# Altium PCB PCB1.PcbDoc
Units mil, origin at the board's own origin, x right, y up, seen from the top; angles counter-clockwise.
Board outline 7940 x 4480 mil, 2 copper layers (Top Layer, Bottom Layer); 28 components, 27 nets, 91 pads, 0 vias.
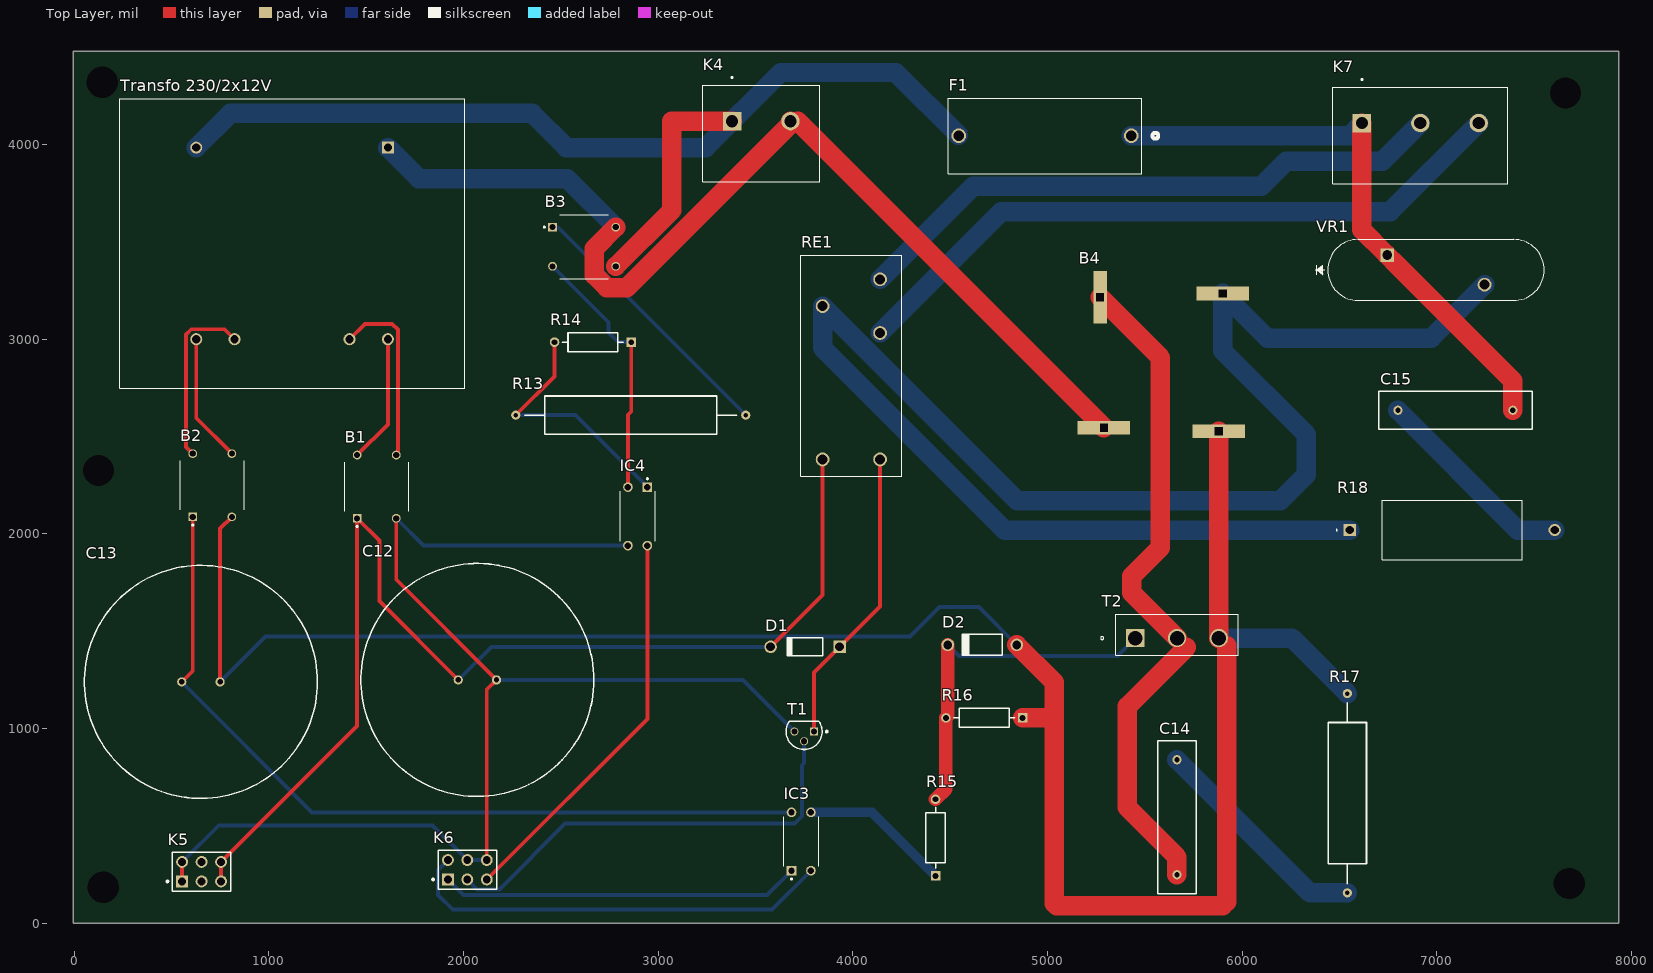
[diagram p0: Top Layer view]
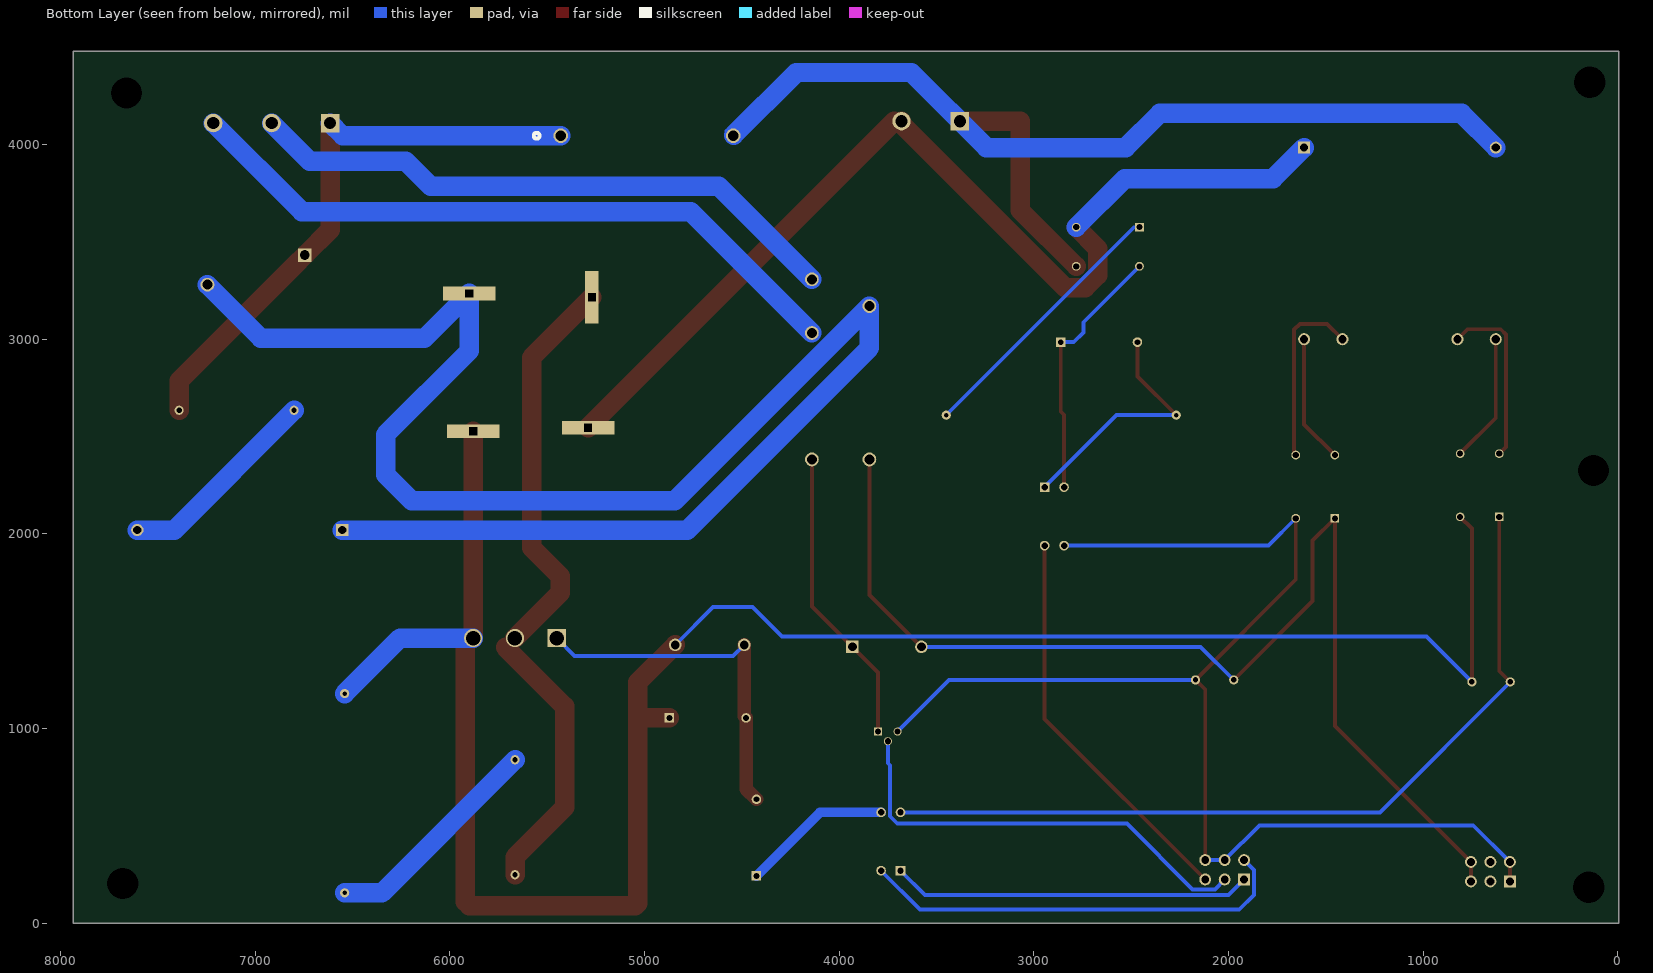
[diagram p1: Bottom Layer view, seen from below]

## Layer stack, top to bottom
Top Solder: solder mask 0.4, Solder Resist, Dk 3.5
Top Layer: signal copper 1.4
Dielectric 1: dielectric 12.6, FR-4, Dk 4.8
Bottom Layer: signal copper 1.4
Bottom Solder: solder mask 0.4, Solder Resist, Dk 3.5

## Board outline
-5,0 7935,0 7935,4480 -5,4480

## Design rules (kind name [scope] priority, off if disabled: settings)
Clearance [All] p1: gap=10 ignorepadtopadclearanceinfootprint=FALSE
Height [All] p1: minheight=0 maxheight=2000 prefheight=500
HoleSize [All] p1: absolutevalues=TRUE maxlimit=300 minlimit=1 maxpercent=80.000 minpercent=20.000
PolygonConnect [All] p1: connectstyle=Relief reliefconductorwidth=10 reliefentries=4 polygonreliefangle="90 Angle" airgapwidth=10
RoutingVias [All] p1: holewidth=28 width=50 viastyle="Through Hole" minholewidth=28 minwidth=50 maxholewidth=28 maxwidth=50
SolderMaskExpansion [All] p1: expansion=4 istentingtop=FALSE
Width [All] p1: maxlimit=100 minlimit=15 preferedwidth=20 minimp=50.000000 maximp=50.000000 favimp=50.000000
28 further rules are at their usual default settings.

## Components (designator, comment, footprint, x,y, rotation, side; value= is the part's Value field where it differs from the comment)
B1 "DB107" DB107 1554.61,2242.6 r90 top
B2 "DB107" DB107 710,2250 r90 top
B3 "DB107" DB107 2620,3475 r0 top
B4 "KBPC3510P" KBPC3510 5585,2881 r0 top
C12 "470µF" Capacitor 1973.15,1250 r0 top
C13 "470µF" Capacitor 553.15,1240 r0 top
C14 "Capacitor 0.22µF 630V" 0.22µF 5665,249.45 r90 top
C15 "0.22µF" 0.22µF 7390.55,2635 r180 top
D1 "1N4007-T" 1N4007-T 3755,1420 r180 top
D2 "1N4742A" 1N4742A 4665,1430 r180 top
F1 "6A" FUSE 5430,4045 r180 top
IC3 "PC817X4J000F" PC817X4J000F 3735,420 r90 top
IC4 "PC817X4J000F" PC817X4J000F 2895,2090 r270 top
K4 "" "2-Polige Connector" 3380,4120 r0 top
K5 "TSW-103-08-L-D" Pin3x2 655,265 r0 top
K6 "TSW-103-08-L-D" Pin3x2 2020,275 r0 top
K7 "3-Polige Connetor" "3-Polige Connector" 6615,4110 r0 top
R13 "47K 3W" "47K 3W" 2268.9,2610 r0 top
R14 "10K 2W" Resistor 2665,2985 r180 top
R15 "1K" Resistor 4425,440 r90 top
R16 "10K" Resistor 4675,1055 r180 top
R17 "2K2 2W" "2K2 2W" 6540,1180 r270 top
R18 "560E 5W" "560Ohm 5W" 6552,2020 r0 top
RE1 "G2R-14 DC12" RELAY_G2R-14_OMR 3845,3343.23 r180 top
T1 "BC547B" Transistor 3750,985 r180 top
T2 "STW26NM60N" TO-247_STM 5450.87,1465 r0 top
"Transfo 230/2x12V" "T1" T1 1611.85,3984.25 r270 top
VR1 "V25S275P" VRES_V25S385P_LTF 6745,3431.57 r0 top

## Footprints (in the part's own frame and the unit in brackets; to place one, negate y for a bottom-side part, rotate by r counter-clockwise, add the part's x,y. Pads: shape width x height; smd on the part's side, far side on the other; paste and mask are expansions set on the pad)
0.22µF [mm]
  round 1.2 hole 0.7: 1(0,0) 2(15,0)
  silkscreen extent -2.5,-2.5 17.5,2.5
1N4007-T [mm] "2-Leads, Axial Lead, Body 4.635x2.36mm, Pin Spacing 9mm"
  rect 1.65x1.65 hole 1.15: 1(-4.5,0)
  round 1.65 hole 1.15: 2(4.5,0)
  silkscreen extent -2.32,-1.18 2.32,1.18, body extent -4.93,-1.18 4.93,1.18, height 2.35
1N4742A [mm] "2-Leads, Axial leaded, Body 2.72x5.2mm, Pin Spacing 9mm"
  round 1.65 hole 1.15: 1(-4.5,0) 2(4.5,0)
  silkscreen extent -2.6,-1.36 2.6,1.36, body extent -4.93,-1.36 4.93,1.36, height 2.71
"2-Polige Connector" [mm]
  rect 2.4x2.4 / inner round 2.4 / far side rect 2.4x2.4 hole 1.6: 1(0,0)
  round 2.4 hole 1.6: 2(7.62,0)
  silkscreen extent -3.81,-7.9 11.43,5.8
"2K2 2W" [mm]
  round 1.2 hole 0.6: 1(0,0) 2(26,0)
  silkscreen extent 1.2,-2.5 24.8,2.5
"3-Polige Connector" [mm]
  rect 2.4x2.4 / inner round 2.4 / far side rect 2.4x2.4 hole 1.6: 1(0,0)
  round 2.4 hole 1.6: 2(7.62,0) 3(15.24,0)
  silkscreen extent -3.81,-7.9 19.05,5.8
"47K 3W" [mm]
  round 1.2 hole 0.6: 1(0,0) 2(30,0)
  silkscreen extent 1.2,-2.5 28.8,2.5
"560Ohm 5W" [mil]
  rect 63x63 / inner round 60 / far side rect 63x63 hole 43 paste-99999 mask+0: 1(0,0)
  round 63 / inner round 60 / far side round 63 hole 43 paste-99999 mask+0: 2(1053,0)
  silkscreen extent -69,-152 886,152, body extent -16,-147 1069,147, height 295
Capacitor [mm]
  round 1.2 hole 0.7: 1(0,0) 2(5,0)
  silkscreen extent -12.7,-15.2 17.7,15.2
DB107 [mm] "DB107"
  rect 1.14x1.14 hole 0.79: 1(-4.125,2.55)
  round 1.14 hole 0.79: 2(-4.125,-2.55) 3(4.125,-2.55) 4(4.125,2.55)
  silkscreen extent -5.29,-4.15 3.18,4.15
FUSE [mil]
  round 75 / inner round 60 / far side round 75 hole 55 paste-99999 mask+0: 1(0,0) 2(885.83,0)
  silkscreen extent -139,-194 940,194
KBPC3510 [mil]
  rect 70x270 hole 40 square mask+6: 1(-315,335)
  rect 270x70 hole 40 square mask+5: 2(-295,-335) 3(295,-354) 4(315,354)
PC817X4J000F [mm] "Optocoupler"
  rect 1.26x1.26 / inner round 1.26 / far side rect 1.26x1.26 hole 0.84: 1(-3.81,1.27)
  round 1.26 hole 0.84: 2(-3.81,-1.27) 3(3.81,-1.27) 4(3.81,1.27)
  silkscreen extent -5.01,-2.3 3.25,2.3
Pin3x2 [mm] "CONN, 6-Leads, Body 7.62x5.08mm, Pitch 2.54mm"
  rect 1.55x1.55 hole 1.02: 1(-2.54,-1.27)
  round 1.55 hole 1.02: 2(-2.54,1.27) 3(0,-1.27) 4(0,1.27) 5(2.54,-1.27) 6(2.54,1.27)
  silkscreen extent -4.58,-2.54 3.81,2.54, body extent -3.81,-2.54 3.81,2.54, height 8.38
RELAY_G2R-14_OMR [mil]
  round 71 / inner round 60 / far side round 71 hole 51 paste-99999 mask+0: 1(-295.28,960.63) 2(-295.28,311.02) 3(-295.28,35.43) 4(0,173.23) 5(0,960.63)
  silkscreen extent -407,-88 111,1048
Resistor [mm]
  rect 1.25x1.25 hole 0.75 paste-2539.97 mask+0: 1(-5,0)
  round 1.25 hole 0.75 paste-2539.97 mask+0: 2(5,0)
  silkscreen extent -3.97,-1.25 3.97,1.25, body extent -5.72,-1.35 5.72,1.35, height 0.25
T1 [mil]
  rect 62x62 / inner round 60 / far side rect 62x62 hole 42 paste-99999 mask+0: 1(0,0)
  round 62 / inner round 60 / far side round 62 hole 42 paste-99999 mask+0: 6(0,-984.25) 7(984.25,-984.25) 8(984.25,-787.4) 11(984.25,-196.85) 12(984.25,0)
  silkscreen extent -251,-1378 1235,394, body extent -5,-1373 994,389, height 1294
TO-247_STM [mil]
  rect 94x94 / inner round 60 / far side rect 94x94 hole 74 paste-99999 mask-47: 1(0,0)
  round 94 / inner round 60 / far side round 94 hole 74 paste-99999 mask-47: 2(214.57,0) 3(429.13,0)
  silkscreen extent -178,-90 530,124
Transistor [mm] "TO, 3-Leads, Body Dia 4.7mm, Pitch 1.27mm"
  rect 1.05x1.05 hole 0.8: 1(-1.27,0)
  round 1.05 hole 0.8: 2(0,1.27) 3(1.27,0)
  silkscreen extent -3.08,-1.34 2.35,2.35, body extent -2.35,-1.33 2.36,2.36, height 7.87
VRES_V25S385P_LTF [mil]
  rect 71x71 / inner round 60 / far side rect 71x71 hole 51 paste-99999 mask+0: 1(0,0)
  round 71 / inner round 60 / far side round 71 hole 51 paste-99999 mask+0: 2(500,-151.57)
  silkscreen extent -371,-232 806,81

## Part data
B1 B2 B3 K7: Package=None, Availability=Unavailable, Price=None
  B1 B2 B3: MP=DB107
  K7: MP=TB005-762-03BE
B4: "No Description Available", Mfr_Name="Solid State Manufacturing", RefDes=RefDes, Type=Type
C12 C13: "Capacitor 470µF 50V"
C15: library part "Capacitor 0.22µF 630V", "Capacitor 0.22µF 630V"
D1: "1.0 A Rectifier, 8 pF, 1000 V, -65 to 150 degC, 2-Pin DO-41 Plastic, RoHS, Tape and Reel", Manufacturer="Diodes Inc", Max. Average Rectified Current IO (A)=1, Operating Temperature Range (degC)="-65 to 150", ComponentLink1Description="Manufacturer URL", ComponentLink1URL=http://diodes.com/, ComponentLink2Description=Datasheet, ComponentLink2URL=http://diodes.com/datasheets/ds28002.pdf, CT (pF)=8, DatasheetVersion="Rev. 8-2", Max. IFSM (A)=30, Max. IR (uA)=5, Mounting Technology="Through Hole", PackageDescription="2-Pin Axial Lead, Body 4.635 x 2.36 mm, Lead Spread 25.4 mm", PackageReference=DO-41-P-2, Packing="Tape and Reel", PartNumber=1N4007-T, RoHS=TRUE, VF (V)=1, VRRM (V)=1000
D2: "Zener Diode, 12V, 1W, 5%, -65 to 200 degC, 2-Pin DO-41, Body 2.72 x 5.2 mm, RoHS", Manufacturer="Fairchild Semiconductor", Operating and Storage Temperature Range="-65 to 200 degC", Test Current IZ (mA)=21, Tolerance=5%, ComponentLink1Description="Manufacturer URL", ComponentLink1URL=http://www.fairchildsemi.com/, ComponentLink2Description=Datasheet, ComponentLink2URL=http://www.fairchildsemi.com/ds/1N/1N4744A.pdf, ComponentLink3Description="Package Specification", ComponentLink3URL=http://www.fairchildsemi.com/dwg/DO/DO41A.pdf, DatasheetVersion="Rev. H3", IR (uA)=5, Mounting Technology="Through Hole", PackageDescription="2-Pin Axial leaded, Body 2.72 x 5.2 mm, Lead Spread 25.4 mm", PackageReference=DO-41-2, PackageVersion="Rev. 2", PartNumber=1N4742A, PD (W)=1, RoHS=TRUE, VZ (Max.) (V)=12.6, VZ (Min.) (V)=11.4, ZZ (Max) (ohm)=8
F1: library part Fuse, "No Description Available", Mfr_Name="Littelfuse Inc"
IC3 IC4: "OptoCoupler", Mfr_Name=Sharp, RefDes=RefDes, Type=Type
K4: library part "2-Polige Connector", "2~24 Poles, Screw Type, Horizontal, 7.62 Pitch, 26~10 (AWG), Terminal Block Connector", Package=None, Availability="In Stock", Check_prices=https://www.snapeda.com/parts/TB005-762-02BE/CUI+Devices/view-part/?ref=eda, CUI_purchase_URL=https://www.cuidevices.com/product/interconnect/connectors/terminal-blocks/tb005-762-series?utm_source=snapeda.com&utm_medium=referral&utm_campaign=snapedaBOM, MF="CUI Devices", MP=TB005-762-02BE, Price=None, Purchase-URL=https://pricing.snapeda.com/search/part/TB005-762-02BE/?ref=eda, SnapEDA_Link=https://www.snapeda.com/parts/TB005-762-02BE/CUI+Devices/view-part/?ref=snap
K5 K6: library part Connector3x2, "Male Header, Pitch 2.54 mm, 2 x 3 Position,  8.9 x 15.22 x 11.95 mm", Manufacturer=Samtec, Max Operating Temperature="125 degC", Min Operating Temperature="-55 degC", ComponentLink1Description="Manufacturer URL", ComponentLink1URL=http://www.samtec.com/, ComponentLink2Description=Datasheet, ComponentLink2URL=https://datasheet.ciiva.com/25618/0900766b81154476-25618436.pdf, ComponentLink3Description="Package Specification", ComponentLink3URL=http://suddendocs.samtec.com/prints/tsw-xxx-xx-x-x-xx-xxx-footprint.pdf, DatasheetVersion=04/2012, Lead Pitch="2.54 mm", Mount="Through Hole", Mounting Technology="Through Hole", PackageDescription="Male Header, Pitch 2.54 mm, 2 x 3 Position, Height 8.38 mm, Tail Length 5.08 mm", PackageReference=TSW-103-08-L-D, RoHSCompliant=true
R14 R15 R16: library part "Resistor 250mW"
R18: library part 560ohm5W, "Resistor, 560 Ohm, ± 5%, 5 W, Axial Leaded, Wirewound, General Purpose", Case/Package=Axial, Max Operating Temperature=275°C, Max Power Dissipation=5W, Min Operating Temperature=-40°C, Resistance=560Ω, Temperature Coefficient=-80ppm/°C, Tolerance=5%, Voltage Rating=53V, Composition=Wirewound, Contact Plating=Tin, Diameter=7.5mm, Features="Flame Retardant Coating", Lead Diameter=800µm, Length=18mm, Military Standard=Not, NexarPartId=39746692, Number of Pins=2, Number of Terminations=2, Packaging="Tape & Box (TB)", Power Rating=5W, Radiation Hardening=No, REACH SVHC=Unknown, RoHS=Compliant, Schedule B="8533210080, 8533210080|8533210080|8533210080|8533210080|8533210080", Termination=Axial, Voltage Rating (DC)=53V, Width=7.49mm
RE1: "No Description Available", Mfr_Name=Omron, RefDes=RefDes, Type=Type
T1: "Amplifier Transistor, NPN Silicon, 3-Pin TO-92, Bulk Box", Manufacturer="On Semiconductor", ComponentLink1Description="Manufacturer URL", ComponentLink1URL=http://www.onsemi.com/, ComponentLink2Description=Datasheet, ComponentLink2URL=http://www.onsemi.com/pub_link/Collateral/BC546-D.PDF, ComponentLink3Description="Package Specification", ComponentLink3URL=http://www.onsemi.cn/pub_link/Collateral/2N6426-D.PDF, DatasheetVersion="Rev. 7", fT Min (MHz)=150, IC Continuous (A)=0.1, Mounting Technology="Through Hole", PackageDescription="3-Pin Transistor Outline, Body 4.825 x 3.685 mm, Pitch 1.27 mm", PackageReference=TO-92-3-29-11_AM_SL, PackageVersion="Rev. AM", Packing="Bulk Box", PartNumber=BC547B, Polarity=NPN, RoHS=FALSE
T2: "No Description Available", Mfr_Name=STMicroelectronics
"Transfo 230/2x12V": "No Description Available", Mfr_Name=Myrra, RefDes=RefDes, Type=Type
VR1: library part V25S385P, "No Description Available", Mfr_Name="Littelfuse Inc"

## Free pads (board coordinates)
  round 0 hole 160: 17(145,4320) 18(150,185) 19(7680,205) 20(7660,4265) 21(125,2325)

## Nets (pads, with @x,y where several pads share a name; then routed paths per layer and width w, separated by ;. In a path a pad name is that pad's centre, name@x,y a point inside that pad or via, vN(x,y) a via of type N, cw(c..) or ccw(c..) an arc to the next point about the centre after c; other vN are vias at no path point)
GND: B1.2 C12.2 IC4.3 K5.1 K5.2 K6.4 K6.6 T1.3 | length 6693.7
  Top Layer w20: K5.1 K5.2 ; B1.2 1655,1765 C12.2 2120,1200 K6.6
  Bottom Layer w20: K5.2 743,503 1842,503 K6.4 K6.6 ; B1.2 1795.2,1940 IC4.3 ; C12.2 3435,1250 T1.3
MGND: B2.2 B4.3 C13.2 D2.1 R16.1 R17.1 T2.3 | length 10886.1
  Top Layer w20: C13.2 750,2027.2 B2.2 ; 5035,101.72 5046.72,90 ; T2.3 5920,1425 ; 5900,90 5920,110
  Top Layer w100: D2.1 5035,1237.17 5035,1055 ; R16.1 5035,1055 ; 5035,101.72 5035,1055 ; 5046.72,90 5900,90 ; T2.3 B4.3 ; 5920,110 5920,1425
  Bottom Layer w20: C13.2 983,1473 4293,1473 4445,1625 4647.17,1625 D2.1
  Bottom Layer w100: T2.3 6255,1465 R17.1
NetB1_1: B1.1 C12.1 D1.2 K5.5 K5.6 RE1.5 | length 5948.3
  Top Layer w20: K5.5 K5.6 1454.21,1014.21 B1.1 1568,1966.41 1568,1655.15 C12.1 ; D1.2 3845,1687.17 RE1.5
  Bottom Layer w20: C12.1 2143.15,1420 D1.2
NetB1_3: "Transfo 230/2x12V.11" B1.3 | length 945.7
  Top Layer w20: 1415,3000 1494,3079 1634,3079 1663,3050 1663,2405 B1.3
NetB1_4: "Transfo 230/2x12V.12" B1.4 | length 660.3
  Top Layer w20: B1.4 1611.85,2562.64 1611.85,3000
NetB2_1: B2.1 C13.1 IC3.4 | length 4280.4
  Top Layer w20: C13.1 609.61,1296.46 B2.1
  Bottom Layer w20: C13.1 1223.15,570 IC3.4
NetB2_3: "Transfo 230/2x12V.7" B2.3 | length 663.3
  Top Layer w20: 627.6,3000 627.6,2595.2 B2.3
NetB2_4: "Transfo 230/2x12V.8" B2.4 | length 906.9
  Top Layer w20: B2.4 576,2446.01 576,3025 602,3051 773.45,3051 824.45,3000
NetB3_1: B3.1 R13.2 | length 1392.3
  Bottom Layer w20: B3.1 2484.61,3575.39 R13.2
NetB3_2: B3.2 IC4.2 R14.1 | length 1348.2
  Top Layer w20: IC4.2 2845,2612 2861.85,2628.85 R14.1
  Bottom Layer w20: B3.2 2745,3087.2 2745,3035 2795,2985 R14.1
NetB3_3: "Transfo 230/2x12V.6" B3.3 F1.2 K4.1 | length 5684.7
  Top Layer w100: B3.3 3070,3662.2 3070,4120 K4.1
  Bottom Layer w20: 627.6,3984.25 668.46,3984.25 ; F1.2@4527.17,4018 4579.17,4070 F1.2@4549.17,4040
  Bottom Layer w100: 627.6,3984.25 803.35,4160 2353.36,4160 2529.11,3984.25 3244.25,3984.25 3630,4370 4220.17,4370 F1.2@4542.17,4048
NetB3_4: "Transfo 230/2x12V.1" B3.4 B4.2 K4.2 | length 5299.3
  Top Layer w20: K4.2 K4.2@3716,4120
  Top Layer w100: B3.4 2672.4,3465.39 2672.4,3329.04 2736.84,3264.61 2839.61,3264.61 3680,4105 K4.2 ; K4.2@3716,4120 B4.2
  Bottom Layer w20: 1611.85,3984.25 1617.6,3990
  Bottom Layer w100: 1611.85,3984.25 1771.1,3825 2532.8,3825 B3.4
NetB4_1: B4.1 C14.1 T2.2 | length 3504.1
  Top Layer w20: T2.2 5713,1417.43
  Top Layer w100: B4.1 5580.01,2905.99 5580.01,1930.01 5431.64,1781.64 5431.64,1698.8 T2.2 ; C14.1 5665,340 5410,595 5410,1114.43 5713,1417.43
NetB4_4: B4.4 R18.1 RE1.4 VR1.2 | length 8940.9
  Top Layer w20: B4.4 B4.4@5910,3225
  Bottom Layer w100: R18.1 4780,2020 3845,2955 RE1.4 4845,2170 6195,2170 6330,2305 6330,2510 5900,2940 B4.4 6130,3005 6970,3005 VR1.2
NetC14_2: C14.2 R17.2 | length 1158.2
  Bottom Layer w100: C14.2 6348.62,156.38 R17.2
NetC15_1: C15.1 F1.1 K7.1 VR1.1 | length 3008.2
  Top Layer w100: K7.1 6615,3561.57 6740,3436.57 6800,3376.57 7390.55,2786.02 C15.1
  Bottom Layer w100: F1.1 6550,4045 K7.1
NetC15_2: C15.2 R18.2 | length 1059.7
  Bottom Layer w100: C15.2 7415,2020 R18.2
NetD1_1: D1.1 RE1.1 T1.1 | length 1538.5
  Top Layer w20: T1.1 3800,1287.83 D1.1 4140.28,1628.11 RE1.1
NetD2_2: D2.2 R15.2 R16.2 T2.1 | length 1843.9
  Top Layer w20: R16.2 R16.2@4487.83,1064.68
  Top Layer w70: R15.2 4478.15,690 R16.2 ; R16.2@4487.83,1064.68 D2.2
  Bottom Layer w20: D2.2 4544.83,1373 5358.87,1373 T2.1
NetIC3_1: IC3.1 K6.1 | length 1850.3
  Bottom Layer w20: K6.1 2000.51,144.49 3559.49,144.49 IC3.1
NetIC3_2: IC3.2 K6.2 | length 2230.4
  Bottom Layer w20: K6.2 1869,274 1869,146 1945,70 3585,70 IC3.2
NetIC3_3: IC3.3 R15.1 | length 775.4
  Bottom Layer w50: IC3.3 4098.15,570 R15.1
NetIC4_1: IC4.1 R13.1 R14.2 | length 1286.9
  Top Layer w20: R13.1 2468.15,2809.25 R14.2
  Bottom Layer w20: R13.1 2575,2610 IC4.1
NetIC4_4: IC4.4 K6.5 | length 2056.7
  Top Layer w20: K6.5 2945,1050 IC4.4
NetK6_3: K6.3 T1.2 | length 2285.6
  Bottom Layer w20: K6.3 2070.51,174.49 2185,174.49 2522.51,512 3702,512 3740,550 3740,812 3750,822 T1.2
NetK7_2: K7.2 RE1.3 | length 3107
  Bottom Layer w100: RE1.3 4617.48,3785 6096.87,3785 6226.87,3915 6720,3915 K7.2
NetK7_3: K7.3 RE1.2 | length 3521.2
  Bottom Layer w100: RE1.2 4763.07,3655 6760,3655 K7.3
pads on no net: K5.3 K5.4

## Text inside footprints (layer, text, board x,y; h text height)
B4: Bottom Component Center "-" at 5865,2581.01 h60; Bottom Component Center "~" at 5270,2556.02 h60; Bottom Component Center "~" at 5885,3091.02 h60; Bottom Component Center "+" at 5345,3186 h60; Bottom Component Center "KBPC3510" at 5365,2851 h60